# EAGLE board IR (EAGLE 9.6.2)
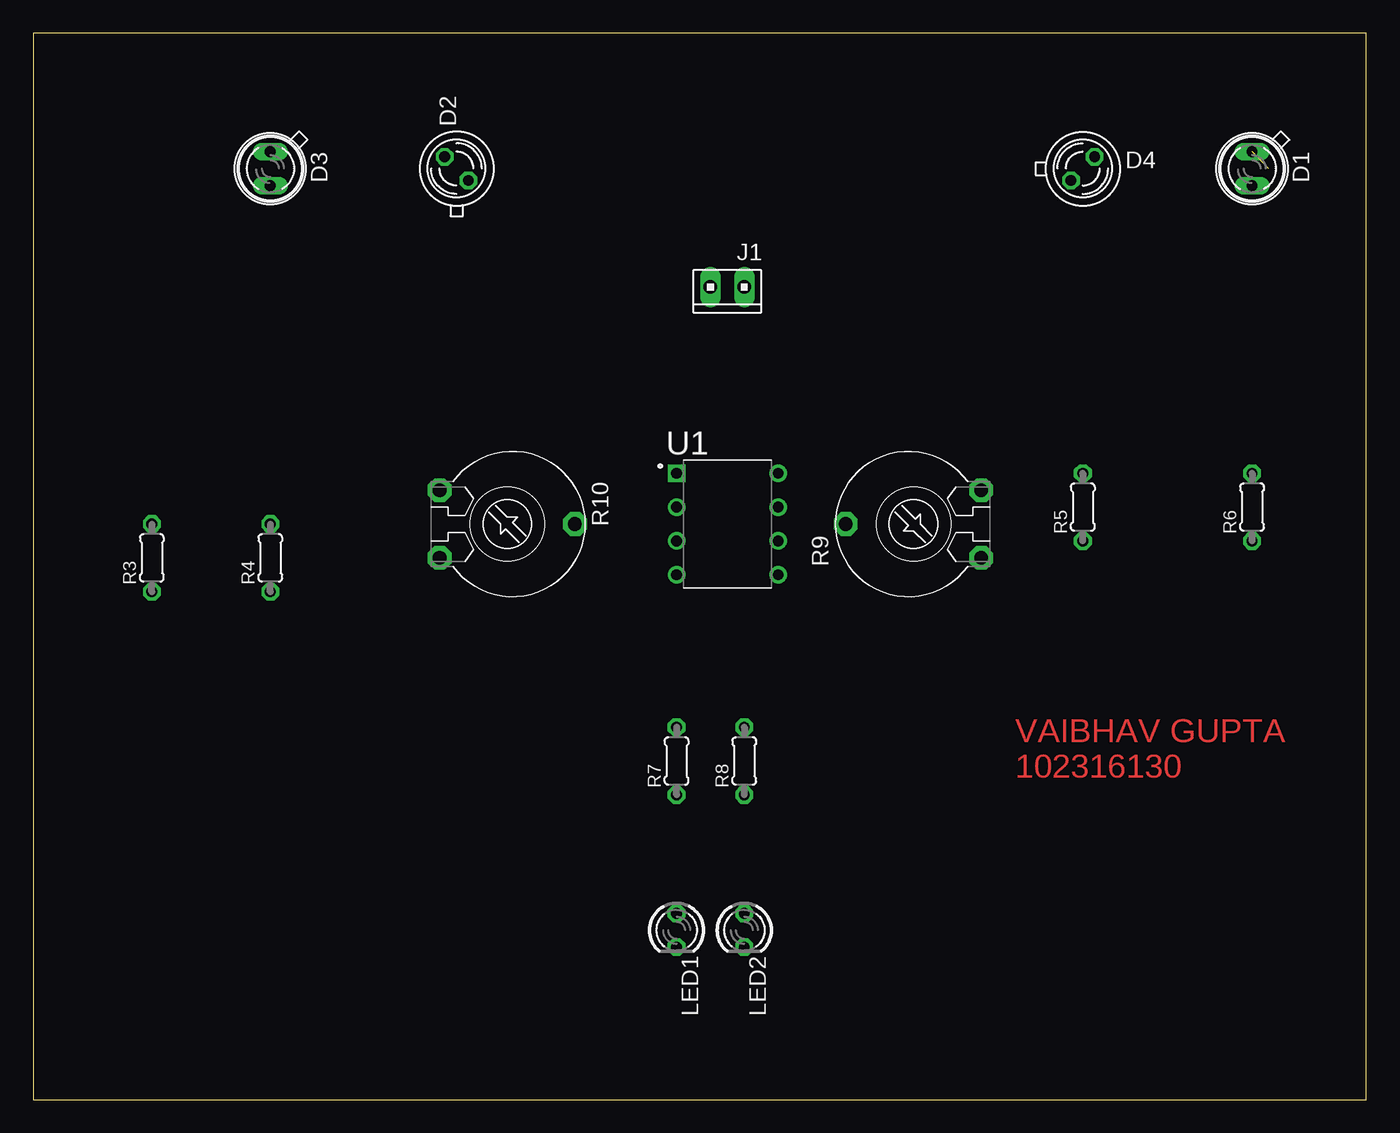
[diagram p0: board, top side]
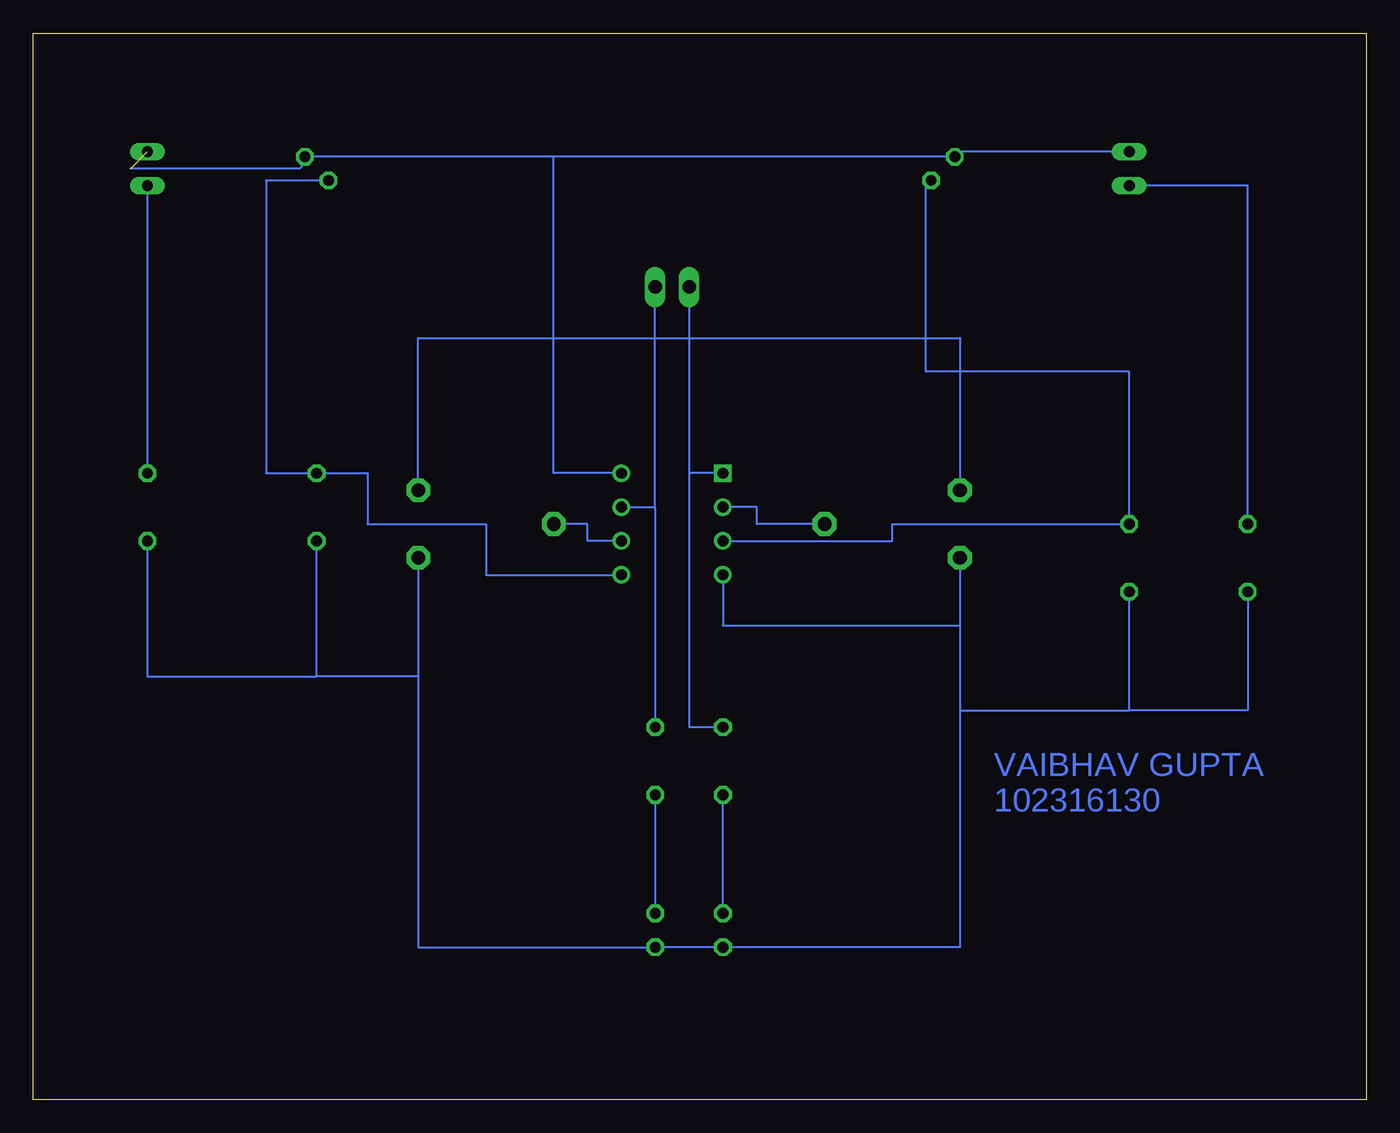
[diagram p1: board, bottom side, seen from below]

Size 100 x 80 mm. Coordinates in mm from the lower left corner, seen from the top.
Outline: 0,0 100,0 100,80 0,80 0,0
Copper layers (1*16): Top 0.035mm / dielectric 1.5mm / Bottom 0.035mm
Design rules "default": minimum track width 6mil, minimum drill 0.35mm, track to track 6mil, track to pad 6mil, pad to pad 6mil, via to via 6mil, smd to smd 6mil, copper to edge 40mil, drill to drill 6mil, minimum pad ring 10mil, minimum via ring 8mil, stop-mask expansion 4mil, vias tented up to drill 0mil, thermal gap 10mil

## Footprints (pad centres in the part's own frame; a part is rotated, then mirrored left to right if it is on the bottom)
SFH482 = drill 0.813 long: A -1.27,0; K 1.27,0
BPX65 = drill 0.813 octagon: A -0.889,-0.889; K 0.889,0.889
10X02MTA = drill 1.016 long: 1 1.27,0; 2 -1.27,0
LED3MM = drill 0.813 octagon: A -1.27,0; K 1.27,0
0204/5 = drill 0.813 octagon: 1 -2.54,0; 2 2.54,0
PT-10 = drill 1.016 pad 1.778 octagon: 1 -2.54,-5.08; 2 2.54,-5.08; 3 0,5.08
DIP762W46P254L960H508Q8 = drill 0.81 pad 1.22 square: 1 -3.81,3.81 | drill 0.81 pad 1.22: 2 -3.81,1.27; 3 -3.81,-1.27; 4 -3.81,-3.81; 5 3.81,-3.81; 6 3.81,-1.27; 7 3.81,1.27; 8 3.81,3.81

## Placement (x,y rotation side)
D1  SFH482  [SFH482]  91.44,69.85 270 top
D2  BPX65  [BPX65]  31.75,69.85 90 top
D3  SFH482  [SFH482]  17.78,69.85 270 top
D4  BPX65  [BPX65]  78.74,69.85 0 top
J1  [10X02MTA]  52.07,60.96 180 top
LED1  [LED3MM]  48.26,12.7 270 top
LED2  [LED3MM]  53.34,12.7 270 top
R3  330ohm  [0204/5]  8.89,40.64 90 top
R4  10K  [0204/5]  17.78,40.64 90 top
R5  10K  [0204/5]  78.74,44.45 90 top
R6  330ohm  [0204/5]  91.44,44.45 90 top
R7  330ohm  [0204/5]  48.26,25.4 90 top
R8  330ohm  [0204/5]  53.34,25.4 90 top
R9  [PT-10]  66.04,43.18 90 top
R10  [PT-10]  35.56,43.18 270 top
U1  LM358N  [DIP762W46P254L960H508Q8]  52.07,43.18 0 top

## Library data of the parts
D1 D3 LED1 LED2 = led
D2 D4 = opto-trans-siemens; MPN: BPX65.; OC_FARNELL: 327451; OC_NEWARK: 06WX2764
J1 = con-amp
R3-R8 = rcl; SPICEPREFIX: R
R9 R10 = rcl; SPICEMODEL: POT; SPICEPREFIX: X
U1 = LM358N; AVAILABILITY: Not in stock; CHECK_PRICES: https://www.snapeda.com/parts/LM358N/Harris/view-part/?ref=eda; DESCRIPTION: General Purpose Amplifier 2 Circuit 8-PDIP; MF: Harris Corporation; MP: LM358N; PACKAGE: None; PRICE: None; SNAPEDA_LINK: https://www.snapeda.com/parts/LM358N/Harris/view-part/?ref=snap

## Nets
N$1: J1.1 R7.2 U1.1
N$2: LED1.A R7.1
N$3: LED2.A R8.1
N$4: J1.2 R8.2 U1.7
N$5: R10.3 U1.2
N$6: R9.3 U1.6
N$7: LED1.K LED2.K R3.1 R4.1 R5.1 R6.1 R9.1 R10.2 U1.4
N$9: D1.K R6.2
N$10: D4.A R5.2 U1.5
N$12: D1.A D2.K D3.A D4.K R9.2 R10.1 U1.8
N$13: D3.K R3.2
N$14: D2.A R4.2 U1.3

## Tracks (layer width: path | path; a pad name or v marks a point on that pad's centre or on a via)
N$1
  Bottom 0.152: U1.1 50.8,46.99 | 50.8,46.99 50.8,27.94 R7.2 | J1.1 50.8,46.99
N$2
  Bottom 0.152: LED1.A R7.1
N$3
  Bottom 0.152: R8.1 LED2.A
N$4
  Bottom 0.152: U1.7 53.34,44.45 | 53.34,44.45 R8.2 | 53.34,44.45 J1.2
N$5
  Bottom 0.152: R10.3 45.72,43.18 45.72,44.45 U1.2
N$6
  Bottom 0.152: U1.6 58.42,41.91 58.42,43.18 R9.3
N$7
  Bottom 0.152: R3.1 8.89,29.21 17.78,29.21 | 17.78,29.21 R4.1 | R6.1 91.44,31.75 78.74,31.75 | 78.74,31.75 R5.1 | 78.74,31.75 71.12,31.75 R9.1 71.12,11.43 LED2.K LED1.K 30.48,11.43 30.48,29.21 | 30.48,35.56 30.48,29.21 | 30.48,29.21 17.78,29.21 | R10.2 30.48,35.56 | U1.4 48.26,35.56 30.48,35.56
N$9
  Bottom 0.152: D1.K R6.2
N$10
  Bottom 0.152: D4.A 82.55,68.96 82.55,46.99 R5.2 74.93,46.99 74.93,43.18 66.04,43.18 66.04,39.37 U1.5
N$12  (1 unrouted)
  Bottom 0.152: D3.A 30.48,71.12 D2.K 60.96,70.74 | D4.K 79.38,70.48 | 92.71,69.85 80.01,69.85 79.38,70.48 | 60.96,70.74 79.12,70.74 79.38,70.48 | 60.96,57.15 60.96,46.99 U1.8 | 60.96,57.15 60.96,70.74 | R9.2 71.12,57.15 60.96,57.15 | 60.96,57.15 30.48,57.15 R10.1
N$13
  Bottom 0.152: R3.2 8.89,68.58 D3.K
N$14
  Bottom 0.152: D2.A 33.02,68.58 33.02,54.61 17.78,54.61 R4.2 35.56,43.18 35.56,41.91 U1.3

## Text on the board
Top: VAIBHAV GUPTA / 102316130
Bottom: VAIBHAV GUPTA / 102316130